# Altium PCB VECTOR_routed_no_sc.PcbDoc (part 3 of 3)
Units mil, origin at the board's own origin, x right, y up, seen from the top; angles counter-clockwise.
Board outline 6000 x 4000 mil, 8 copper layers (Top Layer, Signal Layer 1, Signal Layer 2, Signal Layer 3, Signal Layer 4, VCC, Ground, Bottom Layer), stack 66.302 mil thick; 115 components, 252 nets, 1062 pads, 531 vias.
Unrouted connection lines stored in the file: 3.
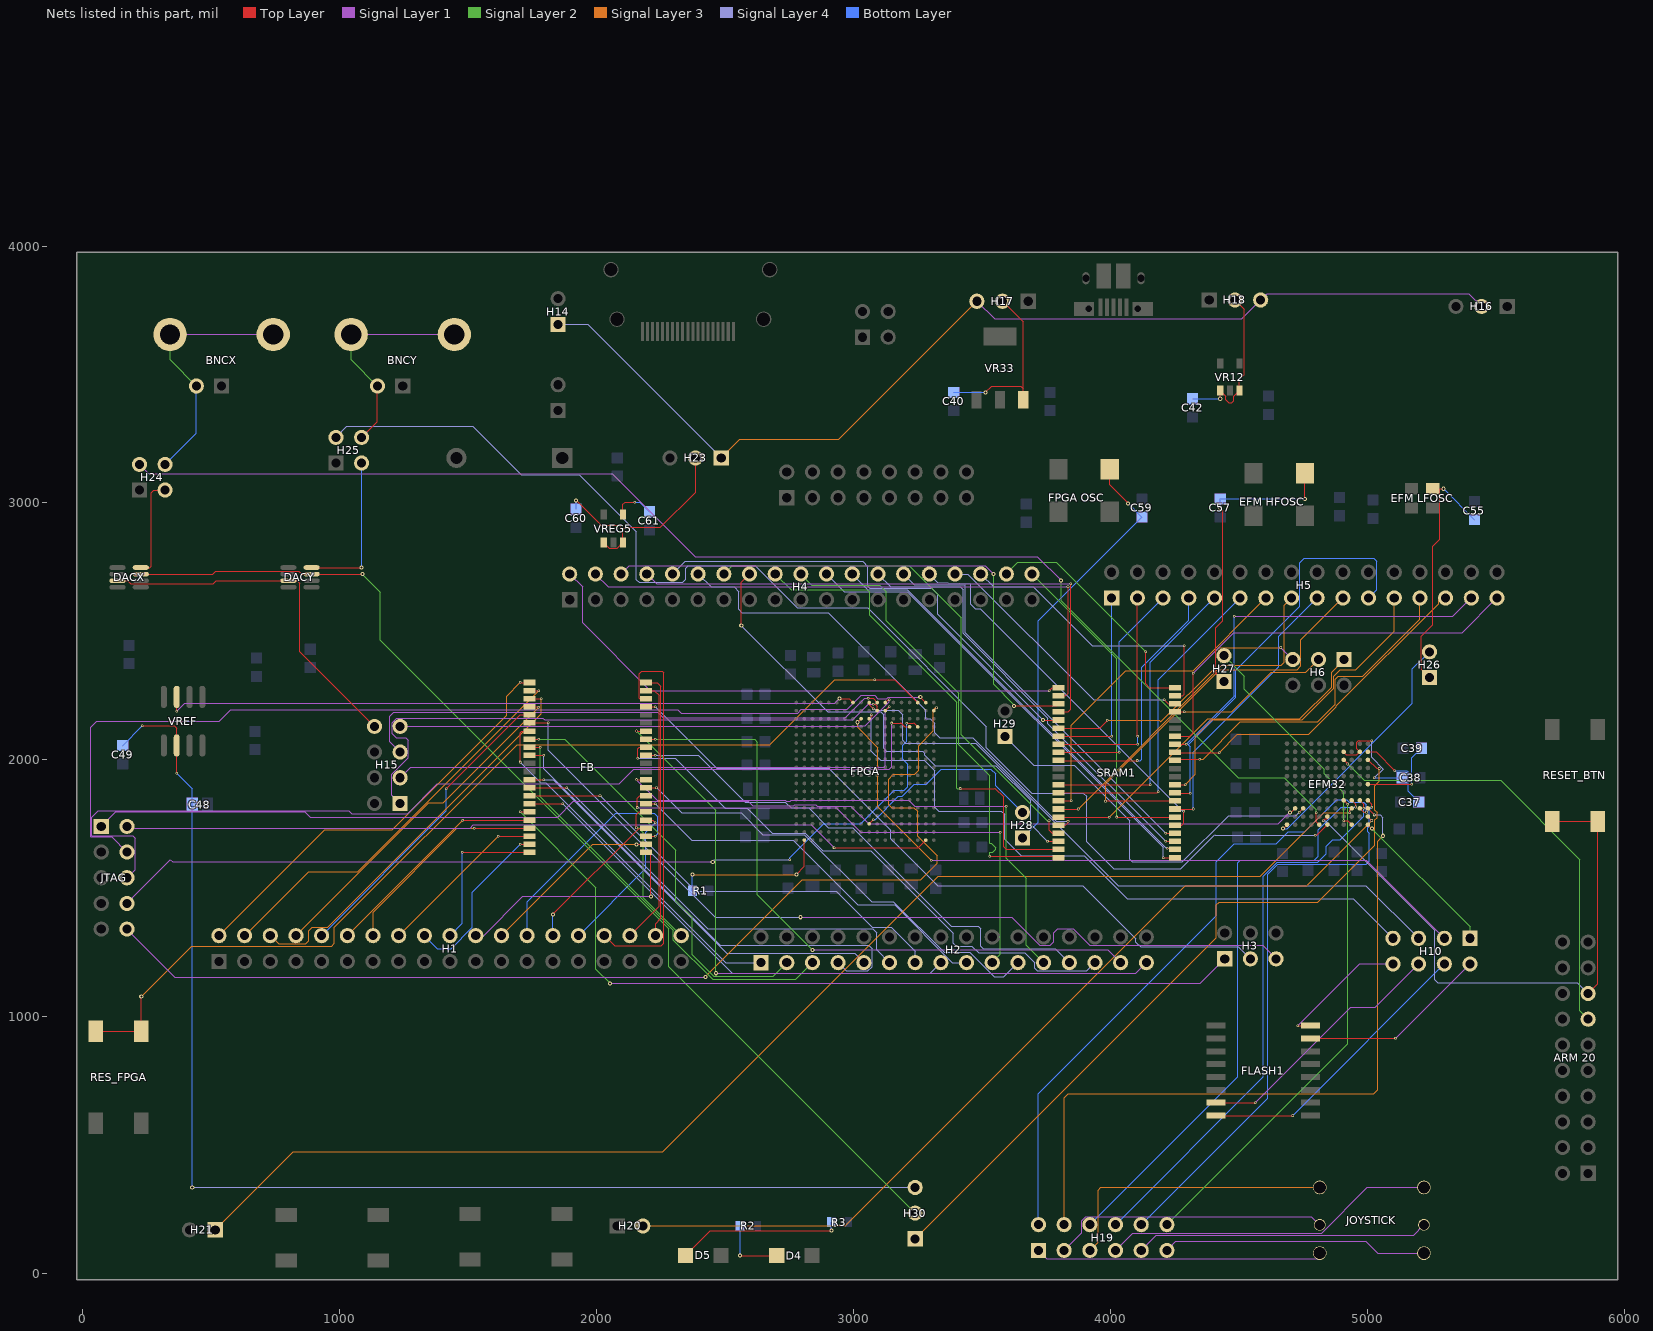
[diagram p9: the nets of this part, all layers, seen from the top]

## Via types
v1: diameter 10, hole 6, Top Layer to Bottom Layer, 277 vias
v2: diameter 16, hole 8, Top Layer to Bottom Layer, 252 vias
v3: diameter 10/10/10/10/10/10 (per signal layer), hole 6, Top Layer to Bottom Layer, 2 vias

## Nets (pads, with @x,y where several pads share a name; then routed paths per layer and width w, separated by ;. In a path a pad name is that pad's centre, name@x,y a point inside that pad or via, vN(x,y) a via of type N, cw(c..) or ccw(c..) an arc to the next point about the centre after c; other vN are vias at no path point) (continued)
"NetARM 20_13": "ARM 20.13" EFM32.C8 | length 1715.2
  Top Layer w4: EFM32.C8@4907.99,1999.49 v1(4924,1983.48)
  Signal Layer 2 w4: v1(4924,1983.48) 4987.48,1920 5519,1920 5828,1611 5828,1022 5860,990
"NetARM 20_15": "ARM 20.15" EFM32.K6 RESET_BTN.2 RESET_BTN.4 | length 2312.1
  Top Layer w4: v1(4829,1763) 4837,1771 4845,1771 EFM32.K6@4845,1779.02 ; RESET_BTN.2@5720,1760 RESET_BTN.4@5897.17,1760 5897.17,1127.17 5860,1090
  Signal Layer 4 w4: v1(4829,1763) 4836,1763 5263,1336 5263,1144 5275,1132 5818,1132 5860,1090
NetBNCX_2: BNCX.2 H24.4 | length 1000.1
  Signal Layer 1 w4: BNCX.2@339.21,3655.79 BNCX.2@740.79,3655.79
  Signal Layer 2 w4: BNCX.2@339.21,3655.79 339.21,3557.36 BNCX.2@441.57,3455
  Bottom Layer w4: H24.4@320,3150 441.57,3271.57 BNCX.2@441.57,3455
NetBNCY_2: BNCY.2 H25.4 | length 870.3
  Top Layer w4: H25.4@1085,3255 1146.57,3316.57 BNCY.2@1146.57,3455
  Signal Layer 1 w4: BNCY.2@1044.21,3655.79 BNCY.2@1445.79,3655.79
  Signal Layer 2 w4: BNCY.2@1044.21,3655.79 1044.21,3557.36 BNCY.2@1146.57,3455
NetC37_1: C37.1 EFM32.B11 | length 324
  Top Layer w4: EFM32.B11@5002.48,2030.98 5034.51,2030.98 v1(5107.5,1958)
  Bottom Layer w4: v1(5107.5,1958) 5154,1958 5159,1953 5159,1876.43 C37.1@5200.43,1835
NetC38_2: C38.2 EFM32.B8 EFM32.B10 | length 457.3
  Top Layer w4: EFM32.B8@4907.99,2030.98 4918.98,2020 4960,2020 EFM32.B10@4970.98,2030.98 4960,2041.97 4960,2068 4967,2075 4968,2074 v1(5017,2074)
  Signal Layer 4 w4: v1(5017,2074) 5017,2009 5062,1964 v1(5028,1930)
  Bottom Layer w4: v1(5028,1930) C38.2@5134.57,1930
NetC39_1: C39.1 EFM32.F11 | length 326
  Top Layer w4: EFM32.F11@5002.48,1905 v1(5173,1905)
  Bottom Layer w4: v1(5173,1905) 5173,2007.57 C39.1@5210.43,2045
NetC40_2: C40.2 H17.2 VR33.3 | length 701.3
  Top Layer w4: v2(3513,3430.43) 3537.57,3455 3650.55,3455 3660.55,3445 ; H17.2@3580,3785 3660.55,3704.45 3660.55,3445 ; VR33.3@3660.55,3401.97 3660.55,3445
  Bottom Layer w4: C40.2@3390,3430.43 v2(3513,3430.43)
NetC42_2: C42.2 H18.2 VR12.1 VR12.3 | length 647.9
  Top Layer w4: v2(4427.6,3405.43) VR12.1@4427.6,3436.85 4449.45,3415 4449.45,3400.55 4460,3390 4473,3390 4480.55,3397.55 4480.55,3415 VR12.3@4502.4,3436.85 4502.4,3480 4522,3499.6 4522,3753 H18.2@4485,3790
  Bottom Layer w4: C42.2@4320,3405.43 v2(4427.6,3405.43)
NetC48_1: C48.1 C49.2 H30.3 VREF.6 | length 4872.4
  Top Layer w4: v1(231.57,2132) 355,2132 365,2122 VREF.6@365,2055.51 v1(365,1948)
  Signal Layer 4 w4: v2(425.47,335) H30.3@3240,335
  Bottom Layer w4: C49.2@155,2055.43 v1(231.57,2132) ; v1(365,1948) 425.47,1887.53 C48.1@425.47,1825 v2(425.47,335)
NetC55_2: "EFM LFOSC.3" C55.2 H26.1 | length 990.6
  Top Layer w4: H26.1@5242.42,2320.16 5210,2352.58 5210,2480 5255,2525 5255,2831 5283,2859 5283,3054.97 ; 5255.1,3054.97 5283,3054.97 ; v2(5297.18,3054.97) 5283,3054.97
  Bottom Layer w4: v2(5297.18,3054.97) C55.2@5417.42,2934.73
NetC57_2: "EFM HFOSC.3"@4757.42,3115.52 C57.2 H27.1 | length 1169.8
  Top Layer w4: v2(4427.42,2980.94) 4438,2970.37 4438,2541 4410,2513 4410,2337.58 H27.1@4442.42,2305.16 ; v2(4757.42,3015.6) 4757.42,3115.52
  Bottom Layer w4: v2(4427.42,2980.94) C57.2@4427.42,3015.6 v2(4757.42,3015.6)
NetC59_2: "FPGA OSC.3"@3997.42,3130.52 C59.2 H28.1 | length 1679.7
  Top Layer w4: 3997.42,3130.52 3997.42,3069.73 v2(4069,2998.15)
  Bottom Layer w4: H28.1@3657.42,1695.16 3719,1756.74 3719,2541.31 C59.2@4122.42,2944.73 v2(4069,2998.15)
NetC60_2: C60.2 H23.2 VREG5.1 VREG5.3 | length 883.1
  Top Layer w4: v2(1920,3010) 2018,2912 2085.4,2912 2102.4,2895 ; VREG5.1@2027.6,2845.87 2049.46,2824 2080.54,2824 VREG5.3@2102.4,2845.87 2102.4,2895 ; H23.2@2385,3175 2385,3042 2248,2905 2112.4,2905 2102.4,2895
  Bottom Layer w4: C60.2@1920,2975.43 v2(1920,3010)
NetC61_2: C61.2 VREG5.4 | length 162.2
  Top Layer w4: VREG5.4@2102.4,2954.13 2102.4,2994.81 2110.6,3003 v1(2149,3003)
  Bottom Layer w4: v1(2149,3003) 2167.43,3003 C61.2@2205,2965.43
NetD4_1: D4.1 R2.1 | length 257.8
  Top Layer w4: v2(2558.5,69.69) D4.1@2700.99,69.69
  Bottom Layer w4: v2(2558.5,69.69) R2.1@2558.5,185
NetD5_1: D5.1 R3.1 | length 640.2
  Top Layer w4: D5.1@2346.26,70.47 2442.79,167 v2(2913.5,167)
  Bottom Layer w4: v2(2913.5,167) R3.1@2913.5,200
NetDACX_3: DACX.3 DACY.3 H30.2 | length 4251.2
  Top Layer w4: DACX.3@225.28,2722.8 506,2722.8 517.2,2734 840,2734 851.2,2722.8 DACY.3@890.28,2722.8 v2(1088,2722.8)
  Signal Layer 2 w4: v2(1088,2722.8) 1158,2652.8 1158,2466 2281.36,1342.64 2281.36,1193.64 H30.2@3240,235
NetDACX_4: DACX.4 H24.3 | length 387.6
  Top Layer w4: DACX.4@225.28,2748.39 260,2748.39 265,2753.39 265,3040 275,3050 H24.3@320,3050
NetDACY_4: DACY.4 H25.3 | length 601.3
  Top Layer w4: DACY.4@890.28,2748.39 v2(1085,2748.39)
  Bottom Layer w4: v2(1085,2748.39) H25.3@1085,3155
NetEFM32_C11: EFM32.C11 H30.1 | length 2870.3
  Top Layer w4: EFM32.C11@5002.48,1999.49 5035.97,1966 v1(5047,1966)
  Signal Layer 3 w4: H30.1@3240,135 4413,1308 4413,1435 4423,1445 4807,1445 5029,1667 5029,1765.99 5038,1774.99 5038,1794.99 5029,1803.99 5029,1898 5047,1916 v1(5047,1966)
NetEFM32_H8: EFM32.H8 H19.12 | length 1950.2
  Top Layer w4: EFM32.H8@4907.99,1842.01 v1(4924,1826)
  Signal Layer 2 w4: H19.12@4220,190 4924,894 v1(4924,1826)
NetEFM32_H9: EFM32.H9 H19.6 | length 2289.4
  Top Layer w4: EFM32.H9@4939.49,1842.01 4955,1826.5 v1(4955,1816)
  Bottom Layer w4: H19.6@3920,190 4495,765 4495,1599 4505,1609 4794,1609 4809.24,1624.24 4809.24,1726.59 4898.65,1816 v1(4955,1816)
NetEFM32_H10: EFM32.H10 H19.8 | length 2169.9
  Top Layer w4: EFM32.H10@4970.98,1842.01 4987,1825.99 v1(4987,1811)
  Bottom Layer w4: H19.8@4020,190 4595,765 4595,1547 4649,1601 4808,1601 4841,1634 4841,1664 4865,1688 4895,1688 4987,1780 v1(4987,1811)
NetEFM32_H11: EFM32.H11 H19.10 | length 2238.1
  Top Layer w4: EFM32.H11@5002.48,1842.01 5018,1826.49 v1(5018,1815)
  Bottom Layer w4: H19.10@4120,190 4612,682 4612,1555 4651,1594 4997,1594 5008,1605 5008,1713 5002,1719 5002,1735 5008,1741 5008,1805 v1(5018,1815)
NetEFM32_J2: EFM32.J2 JTAG.1 | length 4769.5
  Top Layer w4: v2(4699,1795) 4703.5,1795 EFM32.J2@4719.02,1810.51
  Signal Layer 1 w4: JTAG.1@71.26,1740.55 127.71,1797 864,1797 884,1777 1848,1777 1909,1838 2590.5,1838 2607.5,1821 2768,1821 2772,1825 2853,1825 2859,1819 2990,1819 3059,1750 4654,1750 v2(4699,1795)
NetEFM32_J3: EFM32.J3 H29.1 | length 1536.9
  Top Layer w4: v1(4735,1795) EFM32.J3@4750.51,1810.51
  Signal Layer 4 w4: H29.1@3590,2090 3702,1978 3859,1978 4075,1762 4075,1612 4085,1602 4280,1602 4460,1782 4722,1782 v1(4735,1795)
NetEFM32_J9: EFM32.J9 H21.1 | length 5110.1
  Top Layer w4: v1(4932,1794) 4932,1803.02 EFM32.J9@4939.49,1810.51
  Signal Layer 3 w4: H21.1@515,170 818,473 2257,473 3330.06,1546.06 4584.06,1546.06 4833,1795 4834,1794 v1(4932,1794)
NetEFM32_J10: EFM32.J10 H19.2 | length 2455
  Top Layer w4: EFM32.J10@4970.98,1810.51 4986.5,1795 v1(4997,1795)
  Bottom Layer w4: H19.2@3720,190 3720,700 4413,1393 4413,1603 4483,1673 4646,1673 4692,1719 4756,1719 4882,1845 4920,1845 4930,1835 4987,1835 4997,1825 v1(4997,1795)
NetEFM32_J11: EFM32.J11 H19.4 | length 2869.4
  Top Layer w4: EFM32.J11@5002.48,1810.51 v1(5027.99,1785)
  Signal Layer 3 w4: H19.4@3820,190 3820,685 3835,700 5025,700 5040,715 5040,1683 v2(5061,1704)
  Signal Layer 4 w4: v1(5027.99,1785) 5051,1785 5061,1775 v2(5061,1704)
NetEFM32_K11: EFM32.K11 H20.2 | length 3513.8
  Top Layer w4: EFM32.K11@5002.48,1779.02 v1(5018,1763.5)
  Signal Layer 3 w4: H20.2@2180,185 2967,185 4291,1509 4763.5,1509 v1(5018,1763.5)
NetEFM32_L1: EFM32.L1 H26.2 | length 955.8
  Top Layer w4: v2(4672,1732) EFM32.L1@4687.52,1747.52
  Bottom Layer w4: v2(4672,1732) 4688,1732 5176,2220 5176,2353.74 H26.2@5242.42,2420.16
NetEFM32_L5: EFM32.L5 H24.2 | length 5247.6
  Top Layer w4: v1(4802,1793) 4802,1759.02 EFM32.L5@4813.5,1747.52
  Signal Layer 1 w4: H24.2@220,3150 256,3114 2060,3114 2384,2790 3716,2790 v2(3808,2698)
  Signal Layer 2 w4: v2(3808,2698) 3808,2619 4497,1930 4677,1930 4802,1805 v1(4802,1793)
NetEFM32_L6: EFM32.L6 H25.2 | length 5003.5
  Top Layer w4: v1(4798,1706) 4803.48,1706 EFM32.L6@4845,1747.52
  Signal Layer 4 w4: H25.2@985,3255 1028,3298 1518,3298 1707,3109 1933,3109 2155,2887 2155,2701 2165,2691 2335,2691 2346,2702 2346,2745 2356,2755 2617,2755 2781,2591 3055,2591 3517,2129 3517,2047 3694,1870 3895,1870 3907,1858 3907,1681 4013,1575 4274,1575 4407,1708 4409,1706 v1(4798,1706)
NetEFM32_L9: EFM32.L9 H27.2 | length 872.8
  Top Layer w4: v1(4908,1763.27) 4923.74,1763.27 EFM32.L9@4939.49,1747.52
  Signal Layer 2 w4: H27.2@4442.42,2405.16 4522,2325.58 4522,2274 4832.81,1963.19 4832.81,1945.81 4908,1870.62 v1(4908,1763.27)
NetEFM32_L11: EFM32.L11 H10.1 | length 607.2
  Top Layer w4: EFM32.L11@5002.48,1747.52 v2(5018,1732)
  Signal Layer 2 w4: v2(5018,1732) 5400,1350 H10.1@5400,1305
NetFB_1: FB.1 H1.2 | length 1661.7
  Top Layer w4: v1(1702,2301) 1702.29,2300.71 FB.1@1738.62,2300.71
  Signal Layer 3 w4: H1.2@529.33,1315.16 942.17,1728 1204,1728 1649,2173 1649,2248 v1(1702,2301)
NetFB_2: FB.2 H1.4 | length 1577.2
  Top Layer w4: FB.2@1738.62,2269.21 1774.79,2269.21 v1(1775,2269)
  Signal Layer 3 w4: H1.4@629.33,1315.16 878.17,1564 1070,1564 v1(1775,2269)
NetFB_3: FB.3 H1.6 | length 1568.7
  Top Layer w4: FB.3@1738.62,2237.72 v1(1785,2237.72)
  Signal Layer 3 w4: H1.6@729.33,1315.16 761.49,1283 868,1283 880,1295 880,1335 892,1347 953,1347 1785,2179 v1(1785,2237.72)
NetFB_4: FB.4 H1.8 | length 1351.1
  Top Layer w4: FB.4@1738.62,2206.22 1773.78,2206.22 v1(1775,2205)
  Signal Layer 3 w4: H1.8@829.33,1315.16 1347.17,1833 1403,1833 v1(1775,2205)
NetFB_5: FB.5 H1.10 | length 1216.2
  Top Layer w4: v1(1415,1887.72) 1702,2174.72 FB.5@1738.62,2174.72
  Bottom Layer w4: H1.10@929.33,1315.16 1415,1800.83 v1(1415,1887.72)
NetFB_6: FB.18 H1.12 | length 895.7
  Top Layer w4: v1(1479.45,1765.28) FB.18@1738.62,1765.28
  Signal Layer 3 w4: H1.12@1029.33,1315.16 v1(1479.45,1765.28)
NetFB_7: FB.19 H1.14 | length 836.1
  Top Layer w4: v1(1523,1733) 1523.78,1733.78 FB.19@1738.62,1733.78
  Signal Layer 3 w4: H1.14@1129.33,1315.16 1129.33,1406.33 1456,1733 v1(1523,1733)
NetFB_8: FB.20 H1.16 | length 669.6
  Top Layer w4: v1(1616.46,1702.28) FB.20@1738.62,1702.28
  Signal Layer 3 w4: H1.16@1229.33,1315.16 v1(1616.46,1702.28)
NetFB_9: FB.21 H1.18 | length 678.3
  Top Layer w4: v1(1702,1670.79) FB.21@1738.62,1670.79
  Bottom Layer w4: H1.18@1329.33,1315.16 1379.49,1265 1433,1265 1516,1348 1516,1484.79 v1(1702,1670.79)
NetFB_10: FB.22 H1.20 | length 605.5
  Top Layer w4: v1(1477,1639.29) FB.22@1738.62,1639.29
  Bottom Layer w4: H1.20@1429.33,1315.16 1477,1362.83 v1(1477,1639.29)
NetFB_11: FB.23 H1.22 | length 935.9
  Top Layer w4: FB.23@2191.38,1639.29 2211,1639.29 v2(2211,1468)
  Signal Layer 1 w4: H1.22@1529.33,1315.16 1560,1315.16 1712.84,1468 v2(2211,1468)
NetFB_12: FB.24 H1.24 | length 709.4
  Top Layer w4: v2(2155,1670.79) FB.24@2191.38,1670.79
  Signal Layer 3 w4: H1.24@1629.33,1315.16 1984.96,1670.79 v2(2155,1670.79)
NetFB_13: FB.25 H1.26 | length 906.5
  Top Layer w4: FB.25@2191.38,1702.28 v1(2228,1702.28)
  Bottom Layer w4: H1.26@1729.33,1315.16 1729.33,1447.33 2074,1792 2225,1792 2238,1779 2238,1712.28 v1(2228,1702.28)
NetFB_14: FB.26 H1.28 | length 584
  Top Layer w4: v2(1829.33,1398.11) 2165,1733.78 FB.26@2191.38,1733.78
  Bottom Layer w4: H1.28@1829.33,1315.16 v2(1829.33,1398.11)
NetFB_15: FB.27 H1.30 | length 604.4
  Top Layer w4: FB.27@2191.38,1765.28 2217.72,1765.28 v1(2228,1755)
  Bottom Layer w4: H1.30@1929.33,1315.16 2191,1576.83 2191,1718 v1(2228,1755)
NetFB_16: FB.42 H1.32 | length 1529.3
  Top Layer w4: H1.32@2029.33,1315.16 2069.49,1275 2251,1275 2261,1285 2261,2338 2255,2344 2175,2344 2165,2334 2165,2240.22 2167.5,2237.72 FB.42@2191.38,2237.72
NetFB_17: FB.43 H1.34 | length 1042.2
  Top Layer w4: H1.34@2129.33,1315.16 2243,1428.83 2243,2251.21 2225,2269.21 FB.43@2191.38,2269.21
NetFB_18: FB.44 H1.36 | length 1043.9
  Top Layer w4: FB.44@2191.38,2300.71 2235,2300.71 2250,2285.71 2250,1383 2229.33,1362.33 H1.36@2229.33,1315.16
NetFB_19: FB.28 H1.38 | length 589
  Top Layer w4: v1(2155,1735) 2155,1786.77 2165,1796.77 FB.28@2191.38,1796.77
  Signal Layer 2 w4: v1(2155,1735) 2163,1735 2182,1716 2182,1462.49 H1.38@2329.33,1315.16
NetFB_24: FB.7 H2.1 | length 1414.8
  Top Layer w4: v1(1702,1991.16) 1702,2105 1708.73,2111.73 FB.7@1738.62,2111.73
  Signal Layer 4 w4: v1(1702,1991.16) 1782.2,1910.96 1801.04,1910.96 2502,1210 H2.1@2640,1210
NetFB_25: FB.8 H2.3 | length 1607.3
  Top Layer w4: FB.8@1738.62,2080.24 v1(1775,2080.24)
  Signal Layer 2 w4: v1(1775,2080.24) 1875.76,2080.24 2308,1648 2308,1450 2372,1386 2372,1240 2455,1157 2687,1157 H2.3@2740,1210
NetFB_26: FB.9 H2.5 | length 1638.9
  Top Layer w4: FB.9@1738.62,2048.74 v1(1780,2048.74)
  Signal Layer 2 w4: v1(1780,2048.74) 1780,1855 2297.8,1337.2 2297.8,1298.25 2451.06,1145 2775,1145 H2.5@2840,1210
NetFB_27: FB.10 H2.7 | length 1897.9
  Top Layer w4: FB.10@1738.62,2017.24 v1(1794,2017.24)
  Signal Layer 4 w4: v1(1794,2017.24) 1794,1965 2481,1278 3059,1278 3072,1265 3072,1195 3055,1178 2972,1178 H2.7@2940,1210
NetFB_28: FB.13 H2.9 | length 1596.6
  Top Layer w4: FB.13@1738.62,1922.76 v1(1794,1922.76)
  Signal Layer 4 w4: v1(1794,1922.76) 1830.59,1922.76 2507.34,1246 3004,1246 H2.9@3040,1210
NetFB_29: FB.14 H2.11 | length 1722.8
  Top Layer w4: FB.14@1738.62,1891.26 v1(1883.74,1891.26)
  Signal Layer 4 w4: v1(1883.74,1891.26) 2433,1342 3075,1342 3090,1327 3090,1260 H2.11@3140,1210
NetFB_30: FB.15 H2.13 | length 1796.9
  Top Layer w4: FB.15@1738.62,1859.76 v1(2013,1859.76)
  Signal Layer 4 w4: v1(2013,1859.76) 2384.76,1488 2932,1488 3072,1348 3147,1348 3240,1255 H2.13@3240,1210
NetFB_31: FB.16 H2.15 | length 1891.4
  Top Layer w4: FB.16@1738.62,1828.27 v1(1867.73,1828.27)
  Signal Layer 4 w4: v1(1867.73,1828.27) 2527,1169 3299,1169 H2.15@3340,1210
NetFB_32: FB.29 H2.17 | length 1504.7
  Top Layer w4: FB.29@2191.38,1828.27 v1(2228,1828.27)
  Signal Layer 4 w4: v1(2228,1828.27) 2370.27,1686 2765.06,1686 3016.06,1435 3160,1435 3385,1210 H2.17@3440,1210
NetFB_33: FB.30 H2.19 | length 2048.6
  Top Layer w4: v1(2158,1814) 2158,1850.26 2167.5,1859.76 FB.30@2191.38,1859.76
  Signal Layer 1 w4: v1(2158,1814) 2932,1814 3028,1718 v1(3572,1718)
  Signal Layer 2 w4: H2.19@3540,1210 3572,1242 v1(3572,1718)
NetFB_34: FB.31 H2.21 | length 1776.4
  Top Layer w4: FB.31@2191.38,1891.26 2232.74,1891.26 v1(2233,1891)
  Signal Layer 4 w4: v1(2233,1891) 2331,1793 2563,1793 2647,1709 2809.02,1709 3070.02,1448 3155.47,1448 3353.47,1250 3452,1250 3547,1155 3585,1155 H2.21@3640,1210
NetFB_35: FB.32 H2.23 | length 2190.9
  Top Layer w4: v1(2155,1923) 2155.24,1922.76 FB.32@2191.38,1922.76
  Signal Layer 1 w4: v1(2155,1923) 2235.49,1842.51 2734.51,1842.51 2739.02,1838 2754.51,1838 2758.02,1841.51 3214.98,1841.51 3237.49,1819 v1(3594,1819)
  Signal Layer 2 w4: v1(3594,1819) 3594,1616 3672,1538 3672,1278 H2.23@3740,1210
NetFB_36: FB.35 H2.25 | length 2022.8
  Top Layer w4: FB.35@2191.38,2017.24 2227.76,2017.24 v1(2228,2017)
  Signal Layer 4 w4: v1(2228,2017) 2396,2017 2578,1835 2735,1835 2757,1813 2825,1813 2902,1736 2996,1736 3380,1352 3485,1352 3495,1342 3495,1274 3505,1264 3786,1264 H2.25@3840,1210
NetFB_37: FB.36 H2.27 | length 2244
  Top Layer w4: v1(2160,2006) 2160,2043.74 2165,2048.74 FB.36@2191.38,2048.74
  Signal Layer 4 w4: v1(2160,2006) 2305,2006 2500.12,1810.88 2586.12,1810.88 2683,1714 2812.53,1714 2879.97,1646.56 3067.44,1646.56 3388.53,1325.47 3388.53,1285 3399.06,1274.47 3460.53,1274.47 3487,1248 3667,1248 3705,1210 3705,1188 3715,1178 3908,1178 H2.27@3940,1210
NetFB_38: FB.37 H2.29 | length 2557.6
  Top Layer w4: FB.37@2191.38,2080.24 2227.76,2080.24 v1(2228,2080)
  Signal Layer 1 w4: v2(2840,1260) 3990,1260 H2.29@4040,1210
  Signal Layer 2 w4: v1(2228,2080) 2615,2080 2626,2069 2626,1474 v2(2840,1260)
NetFB_39: FB.38 H2.31 | length 2800.5
  Top Layer w4: v1(2155,2112) 2155.27,2111.73 FB.38@2191.38,2111.73
  Signal Layer 1 w4: v2(2464,1169) 4099,1169 H2.31@4140,1210
  Signal Layer 2 w4: v1(2155,2112) 2464,1803 v2(2464,1169)
NetFB_40: FB.17 H3.1 | length 3282.5
  Top Layer w4: v1(1702,1797) 1702.23,1796.77 FB.17@1738.62,1796.77
  Signal Layer 1 w4: v2(2052,1129) 4349,1129 H3.1@4445,1225
  Signal Layer 2 w4: v1(1702,1797) 1997,1502 1997,1184 v2(2052,1129)
NetFB_41: FB.41 H3.3 | length 2786.7
  Top Layer w4: FB.41@2191.38,2206.22 v1(2227.78,2206.22)
  Signal Layer 4 w4: v1(2227.78,2206.22) 2467,1967 2903,1967 3144,1726 3144,1693 3327,1510 3892,1510 4099,1303 4099,1290.47 4117.47,1272 4498,1272 H3.3@4545,1225
NetFB_44: FB.6 H3.5 | length 3422.1
  Top Layer w4: FB.6@1738.62,2143.23 v1(1812,2143.23)
  Signal Layer 1 w4: v2(2793,1387) 3616.47,1387 3725,1278.47 3766.47,1278.47 3780,1292 3780,1327 3795,1342 3855,1342 3920,1277 4593,1277 H3.5@4645,1225
  Signal Layer 4 w4: v1(1812,2143.23) 1812,2037 2462,1387 v2(2793,1387)
NetFLASH1_1: FLASH1.15 H10.2 | length 741.1
  Top Layer w4: FLASH1.15@4779.06,915 v1(5110,915)
  Signal Layer 1 w4: v1(5110,915) H10.2@5400,1205
NetFLASH1_2: FLASH1.8 H10.4 | length 1133.4
  Top Layer w4: FLASH1.8@4410.94,615 v1(4710,615)
  Bottom Layer w4: v1(4710,615) H10.4@5300,1205
NetFLASH1_5: FLASH1.7 H10.6 | length 1012.7
  Top Layer w4: FLASH1.7@4410.94,665 v1(4564,665)
  Signal Layer 1 w4: v1(4564,665) 4936,1037 5032,1037 H10.6@5200,1205
NetFLASH1_6: FLASH1.16 H10.8 | length 518.5
  Top Layer w4: v1(4730,965) FLASH1.16@4779.06,965
  Signal Layer 1 w4: v1(4730,965) 4970,1205 H10.8@5100,1205
NetFPGA_A8: FPGA.A8 VREF.3 | length 2716.3
  Top Layer w4: v1(365,2188) VREF.3@365,2244.49 ; v2(2945,2238) 2982.47,2238 FPGA.A8@2997.76,2222.72
  Signal Layer 1 w4: v1(365,2188) 396,2219 2926,2219 v2(2945,2238)
NetFPGA_A10: FPGA.A10 H10.5 | length 2592.1
  Top Layer w4: FPGA.A10@3060.75,2222.72 3060.75,2214.42 v1(3077.17,2198) 3077.17,2203.12
  Signal Layer 4 w4: v1(3077.17,2198) 3077.17,2195.41 3080.38,2198.62 3087,2192 3175,2192 3191,2176 3191,2076 3202,2065 3476,2065 4031,1510 4995,1510 H10.5@5200,1305
NetFPGA_A11: FPGA.A11 H15.5 | length 2108.5
  Top Layer w4: v1(3057,2239) 3075.96,2239 FPGA.A11@3092.24,2222.72
  Signal Layer 1 w4: H15.5@1235,2030 1194,2071 1194,2169.53 1209.47,2185 2238,2185 2260,2163 2968,2163 3044,2239 v1(3057,2239)
NetFPGA_A12: FPGA.A12 H15.7 | length 1971.3
  Top Layer w4: FPGA.A12@3123.74,2222.72 3134.49,2233.46 v1(3139,2233.46)
  Signal Layer 1 w4: H15.7@1235,2130 3018,2130 3021,2133 3046.58,2133 3139,2225.42 v1(3139,2233.46)
NetFPGA_A16: FPGA.A16 RES_FPGA.1 RES_FPGA.3 | length 3918.9
  Top Layer w4: RES_FPGA.1@50,943.27 RES_FPGA.3@227.17,943.27 v2(227.17,1078) ; v1(3083,2312) 3160.44,2312 FPGA.A16@3249.72,2222.72
  Signal Layer 3 w4: v2(227.17,1078) 423.17,1274 968,1274 979,1285 979,1347 1691,2059 2673,2059 2926,2312 v1(3083,2312)
NetFPGA_A17: FPGA.A17 JTAG.4 | length 3922.5
  Top Layer w4: v2(3259.94,2244) FPGA.A17@3281.22,2222.72
  Signal Layer 1 w4: JTAG.4@171.26,1640.55 112.4,1699.41 30.12,1699.41 30.12,2126.12 54,2150 530,2150 575,2195 2316,2195 2329,2182 2782,2182 2796,2196 2975,2196 3030,2251 3082,2251 3095,2238 3129,2238 3135,2244 v2(3259.94,2244)
NetFPGA_B11: FPGA.B11 H15.1 | length 2347.2
  Top Layer w4: v1(3076,2216) 3085.49,2216 3092.24,2209.24 FPGA.B11@3092.24,2191.22
  Signal Layer 1 w4: H15.1@1235,1830 1203,1862 1203,1944 1267,2008 1267,2075 1256,2086 1219,2086 1203.47,2101.53 1203.47,2144.47 1221,2162 1791,2162 1798,2155 2996,2155 3057,2216 v1(3076,2216)
NetFPGA_B12: FPGA.B12 H15.3 | length 2167.3
  Top Layer w4: FPGA.B12@3123.74,2191.22 3139,2206.48 v1(3139,2207)
  Signal Layer 1 w4: H15.3@1235,1930 1275.75,1970.75 3118.66,1970.75 3124,1976.08 3124,2192 v1(3139,2207)
NetFPGA_B18: FPGA.B18 JTAG.10 | length 4294.6
  Top Layer w4: FPGA.B18@3312.72,2191.22 3323,2201.5 v1(3323,2203)
  Signal Layer 1 w4: JTAG.10@171.26,1340.55 357.81,1154 v2(2423,1154)
  Signal Layer 3 w4: v2(2423,1154) 2423,1156 2800,1533 3261,1533 3325,1597 3325,1627 3250,1702 3250,1799 3235,1814 3148,1814 3137,1825 3137,1925 3155,1943 3238,1943 3254,1959 3254,2055 3311,2112 3311,2195 3319,2203 v1(3323,2203)
NetFPGA_C9: FPGA.C9 H10.3 | length 2798.4
  Top Layer w4: v2(3015.55,2146.02) FPGA.C9@3029.25,2159.72
  Signal Layer 1 w4: v1(3303,1609) 4996,1609 H10.3@5300,1305
  Signal Layer 3 w4: v2(3015.55,2146.02) 3015.55,2126.45 3095,2047 3095,1817 v1(3303,1609)
NetFPGA_C10: FPGA.C10 H10.7 | length 2636.6
  Top Layer w4: FPGA.C10@3060.75,2159.72 3072.64,2171.61 v1(3069.25,2175)
  Signal Layer 4 w4: v1(3069.25,2175) 3069.25,2036.42 3067.91,2035.09 3105,1998 3276,1998 3317,1957 3317,1815 3332,1800 3575,1800 3588,1787 3588,1690 3652,1626 3899,1626 4066,1459 4946,1459 H10.7@5100,1305
NetFPGA_D15: FPGA.D15 JTAG.6 | length 3863.9
  Top Layer w4: v1(3149,2143) 3184.39,2143 3184.69,2143.31 3199.77,2128.23 FPGA.D15@3218.23,2128.23
  Signal Layer 1 w4: JTAG.6@171.26,1540.55 203,1572.29 203,1695 194.26,1703.74 34.45,1703.74 34.45,1776.57 59.65,1801.77 1034.23,1801.77 1046,1790 1264,1790 1380,1906 2087,1906 2145,1964 3140,1964 3149,1973 v1(3149,2143)
NetFPGA_D16: FPGA.D16 JTAG.8 | length 3553.1
  Top Layer w4: v1(3207.48,2142.72) 3232.67,2142.72 3233.95,2144 FPGA.D16@3249.72,2128.23
  Signal Layer 1 w4: JTAG.8@171.26,1440.55 340.71,1610 348.71,1602 v2(2452,1602)
  Signal Layer 4 w4: v2(2452,1602) 2452,1608 2455,1611 v1(2752,1611)
  Bottom Layer w4: v1(2752,1611) 2752,1618 2885,1751 3029,1751 3159,1881 3197,1881 3211,1895 3211,1983 3192.48,2001.52 3192.48,2056.48 3207.48,2071.48 v1(3207.48,2142.72)
NetFPGA_T10: FPGA.T10 H28.2 | length 782.3
  Top Layer w4: FPGA.T10@3060.75,1750.28 v1(3077.17,1766.73)
  Bottom Layer w4: v1(3077.17,1766.73) 3083.73,1766.73 3175,1858 3190,1858 3237,1905 3283,1905 3342,1964 3535,1964 3553,1946 3553,1899.58 H28.2@3657.42,1795.16
NetFPGA_V2: FPGA.V2 R1.1 | length 614.7
  Top Layer w4: v2(2778,1554) 2808.78,1584.78 FPGA.V2@2808.78,1687.28
  Signal Layer 3 w4: v2(2373,1553) 2777,1553 v2(2778,1554)
  Bottom Layer w4: v2(2373,1553) 2373,1490.5 R1.1@2373.5,1490
NetFPGA_V17: FPGA.V17 JTAG.2 | length 3166.2
  Top Layer w4: v1(2924.05,1658) 3251.94,1658 FPGA.V17@3281.22,1687.28
  Signal Layer 1 w4: JTAG.2@171.26,1740.55 177.81,1734 1507.89,1734 1519.89,1746 2836.05,1746 v1(2924.05,1658)
NetH4_2: H4.2 SRAM1.1 | length 2178.5
  Top Layer w4: v1(3762,2269) 3773.71,2280.71 SRAM1.1@3798.62,2280.71
  Signal Layer 1 w4: H4.2@1895.08,2723.03 1945,2673.11 1945,2533 2209,2269 v1(3762,2269)
NetH4_4: H4.4 SRAM1.2 | length 2315
  Top Layer w4: SRAM1.2@3798.62,2249.21 3825,2249.21 3835,2259.21 v1(3835,2673.11)
  Signal Layer 1 w4: H4.4@1995.08,2723.03 2045,2673.11 v1(3835,2673.11)
NetH4_6: H4.6 SRAM1.3 | length 2200
  Top Layer w4: v2(3624,2210) 3790.91,2210 SRAM1.3@3798.62,2217.72
  Signal Layer 1 w4: H4.6@2095.08,2723.03 2127.05,2755 3513,2755 v2(3545,2723)
  Signal Layer 2 w4: v2(3545,2723) 3545,2293.72 3624,2214.72 v2(3624,2210)
NetH4_8: H4.8 SRAM1.4 | length 2205
  Top Layer w4: SRAM1.4@3798.62,2186.22 3835,2186.22 3845,2196.22 v1(3845,2685)
  Signal Layer 1 w4: H4.8@2195.08,2723.03 2233.11,2685 v1(3845,2685)
NetH4_10: H4.10 SRAM1.5 | length 1870.5
  Top Layer w4: v2(3737.78,2154.72) SRAM1.5@3798.62,2154.72
  Signal Layer 4 w4: H4.10@2295.08,2723.03 2344.05,2772 3035,2772 3056.11,2750.89 3056.11,2675 3063.11,2668 3304,2668 3327,2645 3327,2565.5 v2(3737.78,2154.72)
NetH4_12: H4.12 SRAM1.18 | length 1967.2
  Top Layer w4: SRAM1.18@3798.62,1745.28 3825,1745.28 3835,1755.28 v1(3835,1761)
  Signal Layer 4 w4: H4.12@2395.08,2723.03 2445.11,2673 2535,2673 2553,2655 2553,2585 2565,2573 2902,2573 3282,2193 3282,2160 3299,2160 3316,2143 3316,2105 3335,2086 3464,2086 3789,1761 v1(3835,1761)
NetH4_14: H4.14 SRAM1.19 | length 2036.3
  Top Layer w4: v1(3761,1763) 3761,1726 3773.22,1713.78 SRAM1.19@3798.62,1713.78
  Signal Layer 2 w4: H4.14@2495.08,2723.03 2527.05,2755 3217,2755 3420,2552 3420,2097 3754,1763 v1(3761,1763)
NetH4_16: H4.16 SRAM1.20 | length 1932.9
  Top Layer w4: v2(2563,2522) 2563,2690.95 H4.16@2595.08,2723.03 ; v1(3755,1682.28) SRAM1.20@3798.62,1682.28
  Signal Layer 4 w4: v2(2563,2522) 2899,2186 3106,2186 3117,2175 3117,2045 3128,2034 3269,2034 3278,2025 3278,2018 3319,1977 3554,1977 3689,1842 3689,1748.28 v1(3755,1682.28)
NetH4_18: H4.18 SRAM1.21 | length 1910.9
  Top Layer w4: v1(3415,1888) 3547,1888 3549,1890 3584,1855 3584,1661.79 3595,1650.79 SRAM1.21@3798.62,1650.79
  Signal Layer 2 w4: H4.18@2695.08,2723.03 2757.11,2661 3054,2661 3063,2652 3063,2562 3401,2224 3401,1890 3403,1888 v1(3415,1888)
NetH4_20: H4.20 SRAM1.22 | length 1857.6
  Top Layer w4: v1(3531,1625) 3792.91,1625 SRAM1.22@3798.62,1619.29
  Signal Layer 2 w4: H4.20@2795.08,2723.03 2838.11,2680 3102,2680 3127,2655 3127,2542 3410,2259 3410,2058 3530,1938 3530,1674 3537,1674 3553,1658 3553,1651 3542,1640 3530,1640 3530,1626 v1(3531,1625)
NetH4_22: H4.22 SRAM1.23 | length 1836.7
  Top Layer w4: v1(4205,1619.29) SRAM1.23@4251.38,1619.29
  Signal Layer 4 w4: H4.22@2895.08,2723.03 2963.55,2654.56 3209.44,2654.56 4205,1659 v1(4205,1619.29)
NetH4_24: H4.24 SRAM1.24 | length 1700.4
  Top Layer w4: v1(4222,1655) 4247.17,1655 SRAM1.24@4251.38,1650.79
  Signal Layer 4 w4: H4.24@2995.08,2723.03 3056.11,2662 3210,2662 4217,1655 v1(4222,1655)
NetH4_26: H4.26 SRAM1.25 | length 1698.7
  Top Layer w4: v1(4215.72,1682.28) SRAM1.25@4251.38,1682.28
  Signal Layer 4 w4: H4.26@3095.08,2723.03 3145.11,2673 3415,2673 3427,2661 3427,2492 3757,2162 3757,2141 v1(4215.72,1682.28)
NetH4_28: H4.28 SRAM1.26 | length 1583.9
  Top Layer w4: v1(4215,1714) 4215.22,1713.78 SRAM1.26@4251.38,1713.78
  Signal Layer 4 w4: H4.28@3195.08,2723.03 3237.11,2681 3435,2681 3435,2494 v1(4215,1714)
NetH4_30: H4.30 SRAM1.27 | length 1501.8
  Top Layer w4: SRAM1.27@4251.38,1745.28 4278,1745.28 4285,1752.28 v1(4285,1800)
  Signal Layer 4 w4: H4.30@3295.08,2723.03 3326.61,2691.5 3456,2686 3456,2605 3474,2587 3494,2587 4281,1800 v1(4285,1800)
NetH4_32: H4.32 SRAM1.42 | length 1065.6
  Top Layer w4: v1(4209.72,2233) 4225,2217.72 SRAM1.42@4251.38,2217.72
  Signal Layer 4 w4: H4.32@3395.08,2723.03 3445,2723.03 3935.03,2233 v1(4209.72,2233)
NetH4_34: H4.34 SRAM1.43 | length 1136.5
  Top Layer w4: SRAM1.43@4251.38,2249.21 4282.21,2249.21 4288,2255 v1(4288,2444)
  Signal Layer 4 w4: H4.34@3495.08,2723.03 3545.11,2673 3700,2673 3929,2444 v1(4288,2444)
NetH4_36: H4.36 SRAM1.44 | length 950
  Top Layer w4: v1(4137,2420) 4137,2295 4151.29,2280.71 SRAM1.44@4251.38,2280.71
  Signal Layer 2 w4: H4.36@3595.08,2723.03 3640.05,2768 3789,2768 v1(4137,2420)
NetH4_38: H4.38 SRAM1.28 | length 1309.2
  Top Layer w4: v1(4025,1777) 4025.23,1776.77 SRAM1.28@4251.38,1776.77
  Signal Layer 2 w4: H4.38@3695.08,2723.03 4025,2393.11 v1(4025,1777)
NetH5_1: H5.1 SRAM1.7 | length 744.6
  Top Layer w4: SRAM1.7@3798.62,2091.73 v1(4005,2091.73)
  Bottom Layer w4: v1(4005,2091.73) H5.1@4005,2630
NetH5_3: H5.3 SRAM1.8 | length 877.9
  Top Layer w4: SRAM1.8@3798.62,2060.24 4105.76,2060.24 v1(4106,2060) ; H5.3@4105,2630 4105,2092 v1(4106,2091)
  Bottom Layer w4: v1(4106,2060) v1(4106,2091)
NetH5_5: H5.5 SRAM1.9 | length 907.9
  Top Layer w4: SRAM1.9@3798.62,2028.74 4034.74,2028.74 v1(4035,2029)
  Bottom Layer w4: v1(4035,2029) 4035,2460 H5.5@4205,2630
NetH5_7: H5.7 SRAM1.10 | length 1034
  Top Layer w4: SRAM1.10@3798.62,1997.24 3804.38,2003 3810.38,1997 v1(4105,1997)
  Bottom Layer w4: v1(4105,1997) 4116.76,1997 4122,2002.24 4122,2361 4305,2544 H5.7@4305,2630
NetH5_9: H5.9 SRAM1.13 | length 1187
  Top Layer w4: SRAM1.13@3798.62,1902.76 v1(4154.76,1902.76)
  Bottom Layer w4: v1(4154.76,1902.76) 4154.76,2379.76 H5.9@4405,2630
NetH5_11: H5.11 SRAM1.14 | length 1275.9
  Top Layer w4: SRAM1.14@3798.62,1871.26 4182,1871.26 v1(4187,1876.26)
  Bottom Layer w4: v1(4187,1876.26) 4187,2312 H5.11@4505,2630
NetH5_13: H5.13 SRAM1.15 | length 1306.6
  Top Layer w4: SRAM1.15@3798.62,1839.76 v1(3847,1839.76)
  Signal Layer 3 w4: v1(3847,1839.76) 3847,2135 4059,2347 4322,2347 H5.13@4605,2630
NetH5_15: H5.15 SRAM1.16 | length 1376.8
  Top Layer w4: SRAM1.16@3798.62,1808.27 v1(3874.27,1808.27)
  Signal Layer 3 w4: v1(3874.27,1808.27) 4434,2368 4665,2368 4676,2379 4676,2601 H5.15@4705,2630
NetH5_17: H5.17 SRAM1.29 | length 1092.4
  Top Layer w4: SRAM1.29@4251.38,1808.27 v1(4322,1808.27)
  Bottom Layer w4: v1(4322,1808.27) 4322,2029 4655,2362 4655,2480 H5.17@4805,2630
NetH5_19: H5.19 SRAM1.30 | length 1621.9
  Top Layer w4: v1(3981,1839) 3981.76,1839.76 SRAM1.30@4251.38,1839.76
  Signal Layer 3 w4: v1(3981,1839) 3981,1907 4425,2351 4728,2351 4742,2365 4742,2467 H5.19@4905,2630
NetH5_21: H5.21 SRAM1.31 | length 1606.9
  Top Layer w4: SRAM1.31@4251.38,1871.26 4252.64,1870 v1(4311,1870)
  Bottom Layer w4: v1(4311,1870) 4311,2050 4303,2058 4488,2243 4488,2349 4737,2598 4737,2766 4755,2784 5025,2784 5037,2772 5037,2662 H5.21@5005,2630
NetH5_23: H5.23 SRAM1.32 | length 1344.2
  Top Layer w4: SRAM1.32@4251.38,1902.76 v1(4291,1902.76)
  Signal Layer 3 w4: v1(4291,1902.76) 4331,1942.76 4331,2090 4396,2155 4746,2155 4870,2279 4870,2325 4895,2350 4955,2350 5105,2500 H5.23@5105,2630
NetH5_25: H5.25 SRAM1.35 | length 1321.7
  Top Layer w4: SRAM1.35@4251.38,1997.24 4256.13,2002 v1(4348,2002)
  Signal Layer 3 w4: v1(4348,2002) 4360.76,2002 4505.74,2146.98 4807.98,2146.98 4876.21,2215.21 4876.21,2313.21 4888,2325 4983,2325 5205,2547 H5.25@5205,2630
NetH5_27: H5.27 SRAM1.36 | length 1317.9
  Top Layer w4: SRAM1.36@4251.38,2028.74 4252.12,2028 v1(4423,2028)
  Signal Layer 3 w4: v1(4423,2028) 4423.26,2028 4494.75,2099.49 4772.5,2099.49 4880.21,2207.2 4880.21,2210 5278,2607.79 5278,2630 H5.27@5305,2630
NetH5_29: H5.29 SRAM1.37 | length 1573.1
  Top Layer w4: SRAM1.37@4251.38,2060.24 v1(4296,2060.24)
  Signal Layer 1 w4: v1(4482,2558) 5333,2558 H5.29@5405,2630
  Bottom Layer w4: v1(4296,2060.24) 4483,2247.24 4482,2248.24 v1(4482,2558)
NetH5_31: H5.31 SRAM1.38 | length 1612.5
  Top Layer w4: SRAM1.38@4251.38,2091.73 4309.73,2091.73 4323,2105 v1(4323,2337)
  Signal Layer 1 w4: v1(4323,2337) 4481,2495 5370,2495 H5.31@5505,2630
NetH6_1: H6.1 SRAM1.17 | length 1399.4
  Top Layer w4: SRAM1.17@3798.62,1776.77 v1(3996,1776.77)
  Signal Layer 3 w4: v1(3996,1776.77) 4379.23,2160 4738,2160 4861,2283 4861,2341 H6.1@4910,2390
NetH6_3: H6.3 SRAM1.41 | length 643
  Top Layer w4: SRAM1.41@4251.38,2186.22 v1(4288,2186.22)
  Signal Layer 3 w4: v1(4288,2186.22) 4472.22,2186.22 4626,2340 4760,2340 H6.3@4810,2390
NetH6_5: H6.5 SRAM1.6 | length 1102.6
  Top Layer w4: SRAM1.6@3798.62,2123.23 3958,2123.23 3987,2152.23 v1(3987,2153)
  Signal Layer 1 w4: v1(4663,2437) H6.5@4710,2390
  Signal Layer 3 w4: v1(3987,2153) 4190,2153 4196,2147 4410,2361 4410,2423 4424,2437 v1(4663,2437)
NetH14_1: H14.1 H16.2 H17.3 H18.3 H23.1 | length 4153.4
  Signal Layer 1 w4: H17.3@3480,3785 3549,3716 4511,3716 H18.3@4585,3790 4610,3815 5395,3815 H16.2@5445,3765
  Signal Layer 3 w4: H23.1@2485,3175 2558,3248 2943,3248 H17.3@3480,3785
  Signal Layer 4 w4: H14.1@1850,3695 1965,3695 H23.1@2485,3175
NetH19_1: H19.1 JOYSTICK.3 | length 1129.3
  Signal Layer 1 w4: H19.1@3720,90 3752,58 4815,58 JOYSTICK.3@4815,79.09
NetH19_3: H19.3 JOYSTICK.2 | length 1090.1
  Signal Layer 1 w4: H19.3@3820,90 3888.47,158.47 3888.47,205 3905,221.53 4782.8,221.53 JOYSTICK.2@4815,189.33
NetH19_5: H19.5 JOYSTICK.1 | length 1115.4
  Signal Layer 3 w4: H19.5@3920,90 3952,122 3952,325 3962,335 JOYSTICK.1@4815,335
NetH19_7: H19.7 JOYSTICK.6 | length 1302
  Signal Layer 1 w4: H19.7@4020,90 4086.47,156.47 4822,156.47 5000.53,335 JOYSTICK.6@5220.51,335
NetH19_9: H19.9 JOYSTICK.5 | length 1141.7
  Signal Layer 1 w4: H19.9@4120,90 4179,149 5180.18,149 JOYSTICK.5@5220.51,189.33
NetH19_11: H19.11 JOYSTICK.4 | length 1034
  Signal Layer 1 w4: H19.11@4220,90 4255,125 4994,125 5039.91,79.09 JOYSTICK.4@5220.51,79.09
SYNC: DACX.7 DACY.7 H15.8 | length 1401
  Top Layer w4: DACX.7@134.72,2697.2 174,2697.2 185.2,2686 507,2686 518.2,2697.2 DACY.7@799.72,2697.2 835,2697.2 845,2687.2 845,2420 H15.8@1135,2130
pads on no net: "ARM 20.2" "ARM 20.3" "ARM 20.5" "ARM 20.11" "ARM 20.17" "ARM 20.19" "EFM HFOSC.1" "EFM HFOSC.3"@4502.42,2895.16 "EFM LFOSC.1" "FPGA OSC.1" "FPGA OSC.3"@3742.42,2910.16 EFM32.A6 EFM32.A8 EFM32.A10 EFM32.A11 EFM32.B5 EFM32.B7 EFM32.C4 EFM32.C5 EFM32.C6 EFM32.C10 EFM32.D3 EFM32.D11 EFM32.E5 EFM32.E6 EFM32.E7 EFM32.F5 EFM32.F6 EFM32.F7 EFM32.G5 EFM32.G6 EFM32.G7 EFM32.H1 EFM32.H2 EFM32.H3 EFM32.H4 EFM32.H5 EFM32.J1 EFM32.J5 EFM32.J6 EFM32.K1 EFM32.K2 EFM32.K5 EFM32.L2 EFM32.L8 FLASH1.1 FLASH1.3 FLASH1.4 FLASH1.5 FLASH1.6 FLASH1.9 FLASH1.11 FLASH1.12 FLASH1.13 FLASH1.14 FPGA.A5 FPGA.A7 FPGA.A9 FPGA.A13 FPGA.A14 FPGA.A15 FPGA.B8 FPGA.B9 FPGA.B14 FPGA.B16 FPGA.C1 FPGA.C2 FPGA.C4 FPGA.C5 FPGA.C6 FPGA.C7 FPGA.C8 FPGA.C11 FPGA.C12 FPGA.C13 FPGA.C14 FPGA.C15 FPGA.D1 FPGA.D2 FPGA.D3 FPGA.D4 FPGA.D6 FPGA.D8 FPGA.D9 FPGA.D11 FPGA.D12 FPGA.D14 FPGA.E1 FPGA.E3 FPGA.E4 FPGA.E6 FPGA.E7 FPGA.E8 FPGA.E11 FPGA.E12 FPGA.E13 FPGA.F1 FPGA.F2 FPGA.F3 FPGA.F4 FPGA.F5 FPGA.F6 FPGA.F7 FPGA.F8 FPGA.F9 FPGA.F10 FPGA.F11 FPGA.F12 FPGA.F13 FPGA.G6 FPGA.G8 FPGA.G9 FPGA.G11 FPGA.H5 FPGA.H6 FPGA.H7 FPGA.L14 FPGA.M8 FPGA.M10 FPGA.M11 FPGA.M13 FPGA.M14 FPGA.N5 FPGA.N6 FPGA.N7 FPGA.N8 FPGA.N9 FPGA.N10 FPGA.N11 FPGA.N12 FPGA.N14 FPGA.N15 FPGA.N16 FPGA.P6 FPGA.P7 FPGA.P8 FPGA.P11 FPGA.P12 FPGA.P15 FPGA.P16 FPGA.P17 FPGA.P18 FPGA.R3 FPGA.R5 FPGA.R7 FPGA.R8 FPGA.R10 FPGA.R11 FPGA.R13 FPGA.R15 FPGA.T3 FPGA.T4 FPGA.T5 FPGA.T6 FPGA.T7 FPGA.T8 FPGA.T9 FPGA.T11 FPGA.T12 FPGA.T13 FPGA.T14 FPGA.T15 FPGA.T17 FPGA.T18 FPGA.U3 FPGA.U5 FPGA.U7 FPGA.U8 FPGA.U10 FPGA.U11 FPGA.U13 FPGA.U15 FPGA.U16 FPGA.U17 FPGA.U18 FPGA.V3 FPGA.V4 FPGA.V5 FPGA.V6 FPGA.V7 FPGA.V8 FPGA.V9 FPGA.V10 FPGA.V11 FPGA.V12 FPGA.V13 FPGA.V14 FPGA.V15 FPGA.V16 H12.2 H13.1 H13.3 HDMI. HDMI.19 PSU. PSU.2 PSU.3 PSU.4 VR12.4 VR33.4 VREF.1 VREF.5 VREF.7 VREF.8

## Polygon pours and split planes (outlines as drawn)
A5V on VCC (split plane): 1665.9,3011.1 1397.9,2743.1 -4.9,2743.1 -4.9,3954.9 1665.9,3954.9
no net on VCC (split plane): 5954.9,-4.9 -4.9,-4.9 -4.9,2732.9 1400.01,2732.9 1401.96,2733.29 1403.61,2734.4 1674.6,3005.39 1675.71,3007.04 1676.1,3008.99 1676.1,3954.9 5954.9,3954.9
AGND on Ground (split plane): 1666.56,3011.76 1397.49,2742.7 -4.9,2742.7 -4.9,3954.9 1666.56,3954.9
GND on Ground (split plane): 5954.9,-4.9 -4.9,-4.9 -4.9,2732.5 1399.61,2732.5 1401.56,2732.89 1403.21,2733.99 1675.26,3006.04 1676.36,3007.7 1676.75,3009.65 1676.75,3954.9 5954.9,3954.9

## Other copper
Ground (plane layer: these items are gaps in the copper):
  lines w10: 1671.65,3959.45 1671.65,3009.65 1399.61,2737.6 -16.34,2737.6 -33.66,2754.92 -33.66,3966.34 -25,3975 1673.43,3975
VCC (plane layer: these items are gaps in the copper):
  lines w10: -25,2738 -25,3975 -23.23,3976.77 1671,3976.77 1671,3008.99 1400.01,2738 -25,2738

## Silkscreen, mask and mechanical layers (free items; w line width, h text height)
Top Overlay:
  drawing of 1553 lines, arcs and shapes, not listed
  text "Christian De Frene" at 770,1050 h60
  text "O" at 760,940 h60
  text "yvind Robertsen" at 820,920 h60
  text "Helmer Nj" at 770,840 h60
  text "a" at 1280,840 h60
  text "e" at 1320,840 h60
  text "rheim" at 1380,840 h60
  text "Jonas Halland" at 770,745 h60
  text "Jonatan Lund" at 770,640 h60
  text "Havard Lian" at 770,530 h60
  text "Anders Lima" at 770,430 h60

## Text inside footprints (layer, text, board x,y; h text height)
"ARM 20": Top Overlay "2" at 5780,290 h50 r90; Top Overlay "1" at 5880,290 h50 r90; Top Overlay "19" at 5880,1350 h50 r90; Top Overlay "20" at 5780,1350 h50 r90
H1: Top Overlay "38" at 2389.33,1295.16 h50; Top Overlay "37" at 2389.33,1195.16 h50; Top Overlay "1" at 429.33,1195.16 h50; Top Overlay "2" at 429.33,1295.16 h50
H2: Top Overlay "32" at 4200,1290 h50; Top Overlay "31" at 4200,1190 h50; Top Overlay "1" at 2540,1190 h50; Top Overlay "2" at 2540,1290 h50
H3: Top Overlay "1" at 4365,1205 h50; Top Overlay "2" at 4345,1305 h50; Top Overlay "5" at 4705,1205 h50; Top Overlay "6" at 4705,1305 h50
H4: Top Overlay "38" at 3755.08,2703.03 h50; Top Overlay "37" at 3755.08,2603.03 h50; Top Overlay "1" at 1795.08,2603.03 h50; Top Overlay "2" at 1795.08,2703.03 h50
H5: Top Overlay "32" at 5565,2710 h50; Top Overlay "31" at 5565,2610 h50; Top Overlay "1" at 3905,2610 h50; Top Overlay "2" at 3905,2710 h50
H6: Top Overlay "1" at 4990,2410 h50 r180; Top Overlay "2" at 5010,2310 h50 r180; Top Overlay "5" at 4650,2410 h50 r180; Top Overlay "6" at 4650,2310 h50 r180
H10: Top Overlay "8" at 5040,1225 h50 r180; Top Overlay "7" at 5040,1325 h50 r180; Top Overlay "1" at 5480,1325 h50 r180; Top Overlay "2" at 5500,1225 h50 r180
H11: Top Overlay "16" at 3500,3100 h50; Top Overlay "15" at 3500,3000 h50; Top Overlay "1" at 2640,3000 h50; Top Overlay "2" at 2640,3100 h50
H13: Top Overlay "3" at 3195,3625 h50; Top Overlay "4" at 3195,3725 h50; Top Overlay "2" at 2935,3725 h50; Top Overlay "1" at 2955,3625 h50
H15: Top Overlay "8" at 1155,2190 h50 r90; Top Overlay "7" at 1255,2190 h50 r90; Top Overlay "1" at 1255,1750 h50 r90; Top Overlay "2" at 1155,1730 h50 r90
H19: Top Overlay "2" at 3620,170 h50; Top Overlay "1" at 3620,70 h50; Top Overlay "1" at 4300,70 h50; Top Overlay "1" at 4340,70 h50; Top Overlay "12" at 4300,170 h50
H24: Top Overlay "1" at 140,3030 h50; Top Overlay "2" at 120,3130 h50; Top Overlay "4" at 380,3130 h50; Top Overlay "3" at 380,3030 h50
H25: Top Overlay "1" at 905,3135 h50; Top Overlay "2" at 885,3235 h50; Top Overlay "4" at 1145,3235 h50; Top Overlay "3" at 1145,3135 h50
JTAG: Top Overlay "2" at 151.26,1840.55 h50 r270; Top Overlay "1" at 51.26,1820.55 h50 r270; Top Overlay "9" at 51.26,1280.55 h50 r270; Top Overlay "10" at 151.26,1280.55 h50 r270